# Altium PCB QuarterRoundPCB.PcbDoc
Units mil, origin at the board's own origin, x right, y up, seen from the top; angles counter-clockwise.
Board outline 2283.46 x 2283.46 mil, 2 copper layers (Top Layer, Bottom Layer); 14 components, 20 nets, 174 pads, 28 vias.
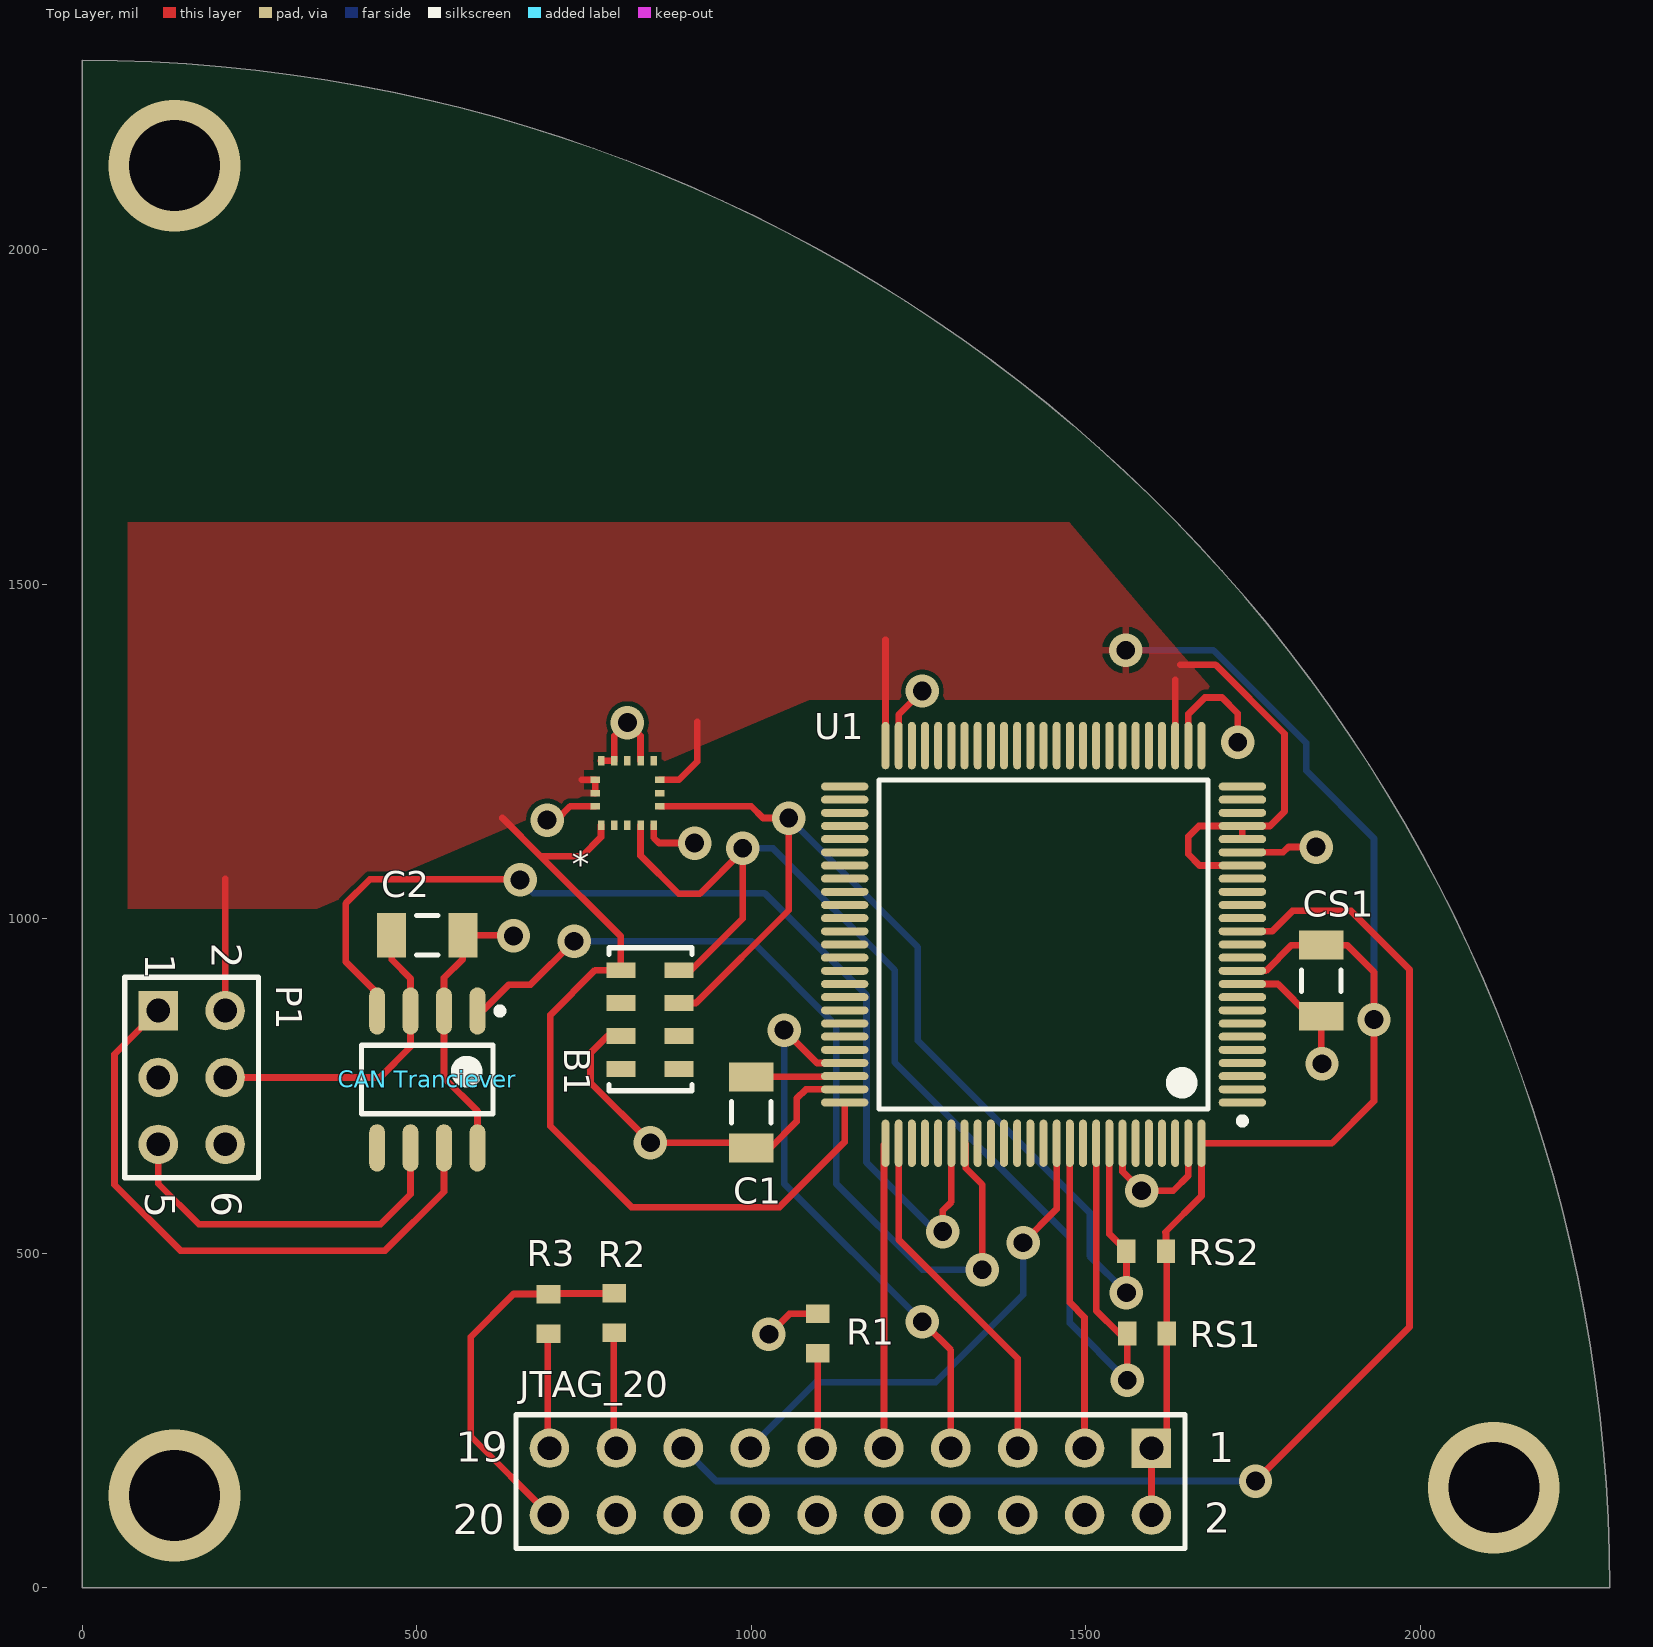
[diagram p0: Top Layer view]
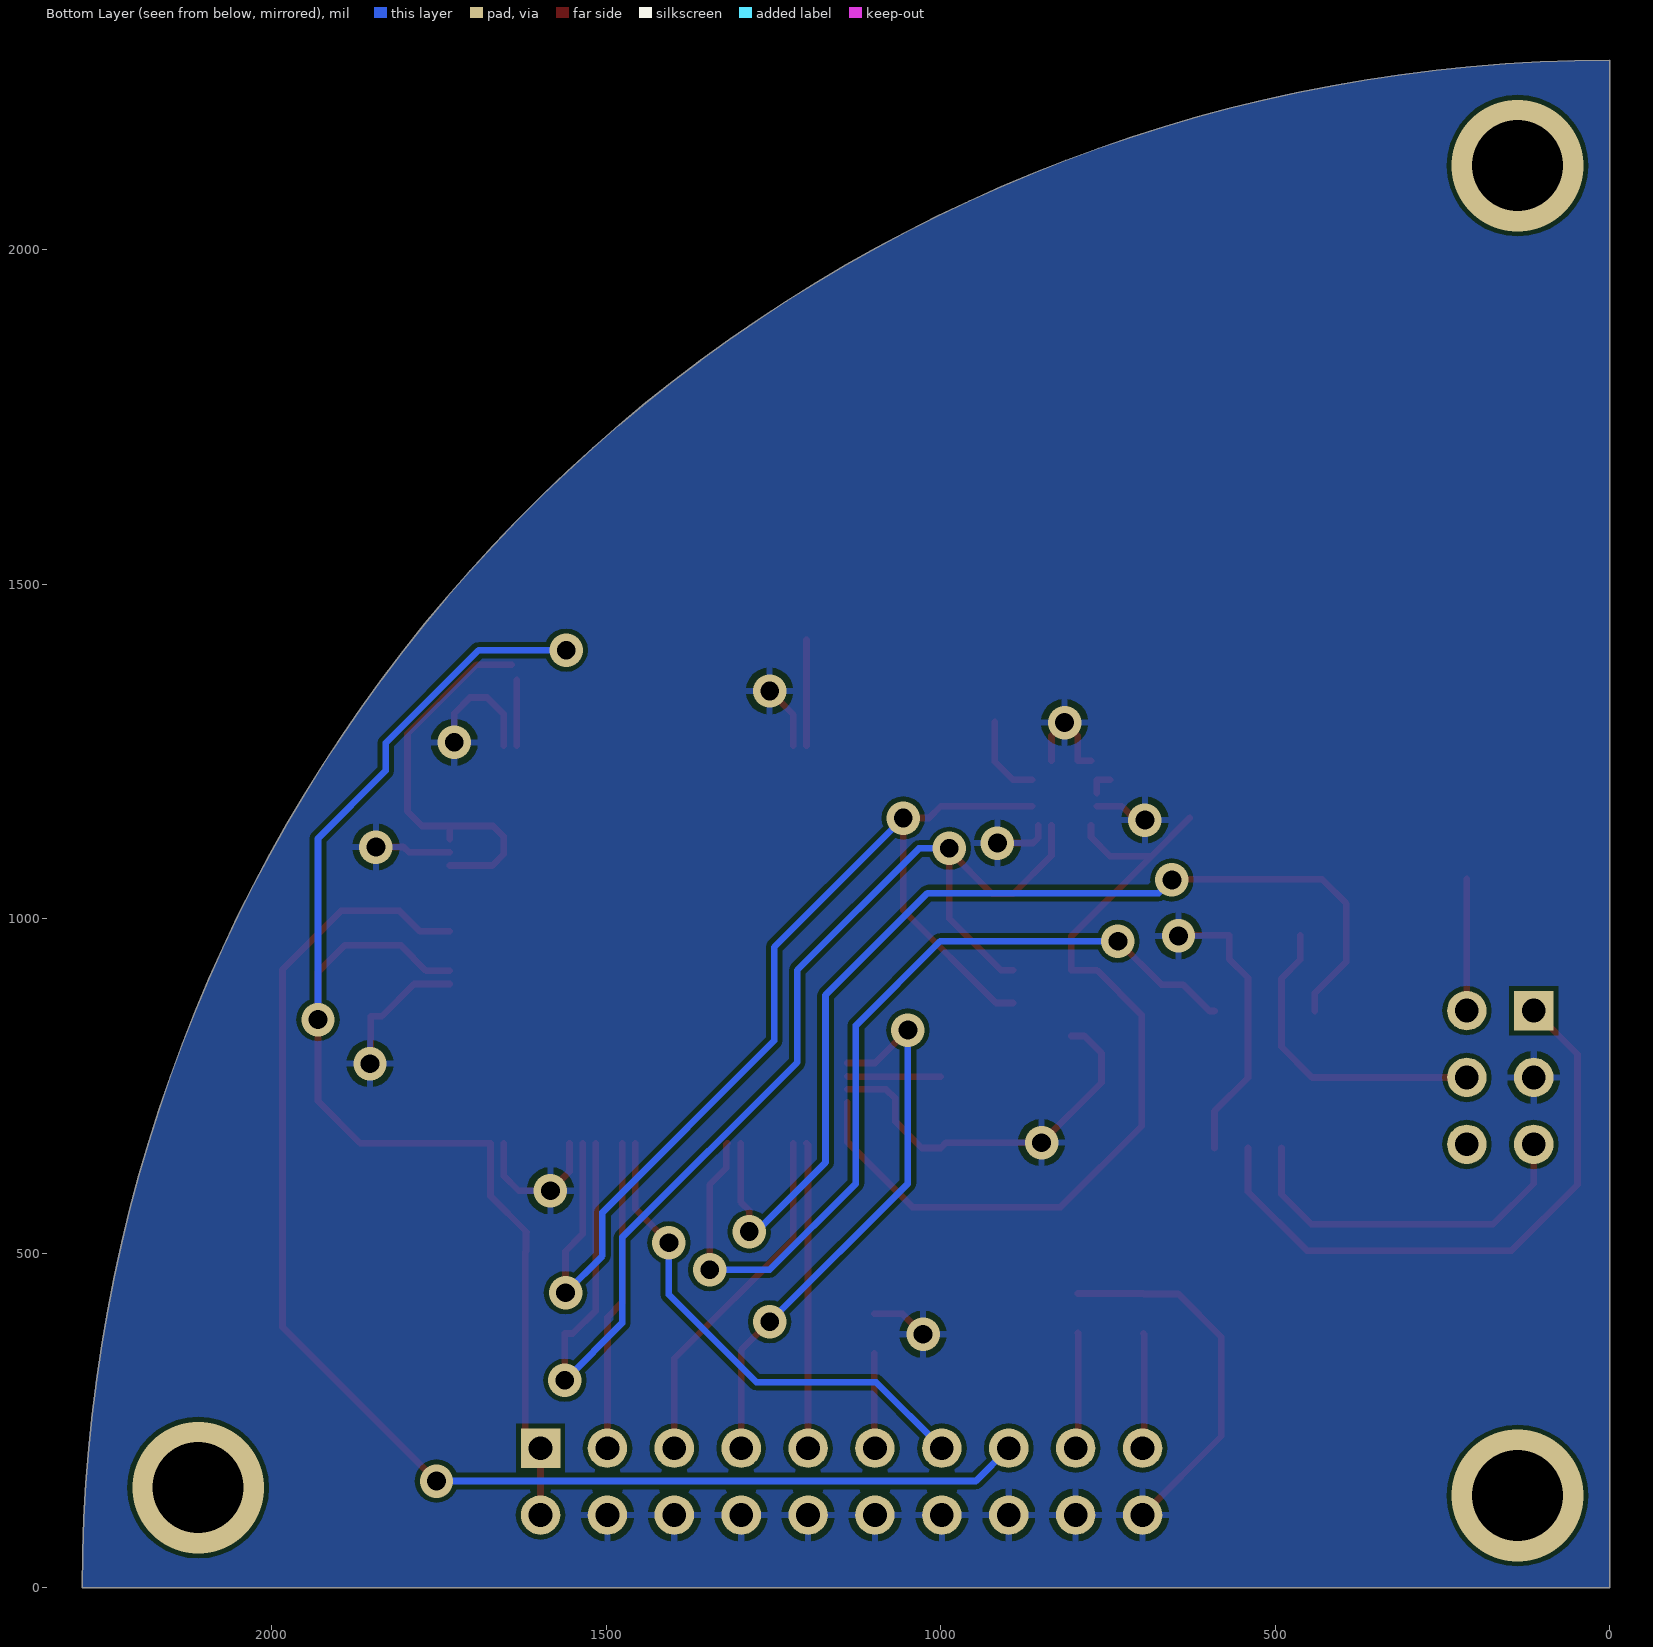
[diagram p1: Bottom Layer view, seen from below]

## Layer stack, top to bottom
Top Solder: solder mask 0.4, Solder Resist, Dk 3.5
Top Layer: signal copper 1.4
Dielectric 1: dielectric 12.6, FR-4, Dk 4.8
Bottom Layer: signal copper 1.4
Bottom Solder: solder mask 0.4, Solder Resist, Dk 3.5

## Board outline
0,2283.46 cw(c0,0) 2283.46,0 0,0

## Design rules (kind name [scope] priority, off if disabled: settings)
Clearance [All] p1: gap=7
HoleSize [All] p1: absolutevalues=TRUE maxlimit=200 minlimit=1 maxpercent=80.000 minpercent=20.000
HoleToHoleClearance [All] p1: gap=7 allowstackedmicrovias=TRUE
MinimumSolderMaskSliver [All] p1: minsoldermaskwidth=1
PolygonConnect [All] p1: connectstyle=Relief reliefconductorwidth=10 reliefentries=4 polygonreliefangle="90 Angle" airgapwidth=10
RoomDefinition Sensors [InComponentClass('Sensors')] p1 off: confinementstyle=ConfineIn formatcopy=TRUE lockcomponents=FALSE outline -3899.61,-2650.59 -1899.61,-2650.59 -1899.61,-1650.59 -3899.61,-1650.59
RoomDefinition apogee_detection_board [InComponentClass('apogee_detection_board')] p2 off: confinementstyle=ConfineIn formatcopy=TRUE lockcomponents=FALSE outline -3899.61,-2650.59 -1899.61,-2650.59 -1899.61,-1650.59 -3899.61,-1650.59
RoutingVias [All] p1: holewidth=28 width=50 viastyle="Through Hole" minholewidth=28 minwidth=50 maxholewidth=28 maxwidth=50
SilkToSilkClearance [All] p1: silktosilkclearance=7
SilkToSolderMaskClearance [IsPad] p1: minsilkscreentomaskgap=3 clearancetoexposedcopper=TRUE
SolderMaskExpansion [All] p1: expansion=4
Width [All] p1: maxlimit=10 minlimit=10 preferedwidth=10
25 further rules are at their usual default settings.

## Classes and differential pairs
component class apogee_detection_board: C1 C2 "CAN Tranciever" JTAG_20 P1 R1 R2 R3
component class Sensors: * B1 CS1 RS1 RS2

## Components (designator, comment, footprint, x,y, rotation, side; value= is the part's Value field where it differs from the comment)
* "LIS331HH Accelerometer" LGA16 775.59,1139.76 r90 top
B1 "MS5607-02BA Barometer" "Barometer LCC" 824.8,923.23 r270 top
C1 "Cap Semi" C1206 1000,710.63 r270 top
C2 "Cap Semi" C1206 515.75,975.39 r180 top
"CAN Tranciever" "TLE8250GVIO" INF-PG-DSO-8-16_N 515.75,759.84 r270 top
CS1 "Cap Semi" C1206 1852.36,907.48 r90 top
JTAG_20 "Header 10X2" HDR2X10 1598.43,208.66 r180 top
P1 "Header 3X2" HDR2X3 113.58,862.8 r270 top
R1 "RTCK PD" J1-0603 1099.41,379.92 r270 top
R2 "DBGRQ PD" J1-0603 795.28,410.43 r270 top
R3 "DBGACK PD" J1-0603 696.85,409.45 r270 top
RS1 "Res3" J1-0603 1591.54,379.92 r0 top
RS2 "Res3" J1-0603 1590.55,502.95 r0 top
U1 "STM32F417VET6" STM-LQFP100_N 1437.01,961.61 r180 top

## Footprints (in the part's own frame and the unit in brackets; to place one, negate y for a bottom-side part, rotate by r counter-clockwise, add the part's x,y. Pads: shape width x height; smd on the part's side, far side on the other; paste and mask are expansions set on the pad)
"Barometer LCC" [mm]
  rect 0.6x1.1 smd: 1(0,-0.5) 2(1.25,-0.5) 3(2.5,-0.5) 4(3.75,-0.5) 5(3.75,1.7) 6(2.5,1.7) 7(1.25,1.7) 8(0,1.7)
  silkscreen extent -0.85,-0.95 4.58,2.2
C1206 [mm] "Chip Capacitor, Body 3.2x1.6mm, IPC High Density"
  rect 1.1x1.7 smd: 1(-1.35,0) 2(1.35,0)
  silkscreen extent -0.4,-0.75 0.4,0.75, body extent -1.7,-0.9 1.7,0.9, height 1.3
HDR2X3 [mm] "Connector; Header; 3x2 Position"
  rect 1.5x1.5 hole 0.9: 1(0,0)
  round 1.5 hole 0.9: 2(0,2.54) 3(2.54,0) 4(2.54,2.54) 5(5.08,0) 6(5.08,2.54)
  silkscreen extent -1.27,-1.27 6.35,3.81
HDR2X10 [mm] "Connector; Header; 10x2 Position"
  rect 1.5x1.5 hole 0.9: 1(0,0)
  round 1.5 hole 0.9: 2(0,2.54) 3(2.54,0) 4(2.54,2.54) 5(5.08,0) 6(5.08,2.54) 7(7.62,0) 8(7.62,2.54) 9(10.16,0) 10(10.16,2.54) 11(12.7,0) 12(12.7,2.54) 13(15.24,0) 14(15.24,2.54) 15(17.78,0) 16(17.78,2.54) 17(20.32,0) 18(20.32,2.54) 19(22.86,0) 20(22.86,2.54)
  silkscreen extent -1.27,-1.27 24.13,3.81
INF-PG-DSO-8-16_N [mm] "SOP, 8-Leads, Body 4.9x3.9mm, Pitch 1.27mm, IPC Medium Density"
  oval 1.8x0.6 smd: 1(-2.6,1.905) 2(-2.6,0.635) 3(-2.6,-0.635) 4(-2.6,-1.905) 5(2.6,-1.905) 6(2.6,-0.635) 7(2.6,0.635) 8(2.6,1.905)
  silkscreen extent -2.72,-2.5 1.3,2.88, body extent -2,-2.5 2,2.5, height 1.75
J1-0603 [mm] "Chip Resistor, Body 1.6x0.8mm, IPC High Density"
  rect 0.7x0.9 smd: 1(-0.75,0) 2(0.75,0)
  body extent -0.85,-0.48 0.85,0.48, height 0.9
LGA16 [mm]
  rect 0.35x0.25 smd: 1(0,0) 2(0,-0.5) 3(0,-1) 4(0,-1.5) 5(0,-2) 9(2.45,-2) 10(2.45,-1.5) 11(2.45,-1) 12(2.45,-0.5) 13(2.45,0)
  rect 0.25x0.35 smd: 6(0.725,-2.225) 7(1.225,-2.225) 8(1.725,-2.225) 14(1.725,0.225) 15(1.225,0.225) 16(0.725,0.225)
STM-LQFP100_N [mm] "Thin QFP, 100-Leads, Body 14x14mm, Pitch 0.5mm, IPC Medium Density"
  oval 1.8x0.3 smd: 1(-7.55,6) 2(-7.55,5.5) 3(-7.55,5) 4(-7.55,4.5) 5(-7.55,4) 6(-7.55,3.5) 7(-7.55,3) 8(-7.55,2.5) 9(-7.55,2) 10(-7.55,1.5) 11(-7.55,1) 12(-7.55,0.5) 13(-7.55,0) 14(-7.55,-0.5) 15(-7.55,-1) 16(-7.55,-1.5) 17(-7.55,-2) 18(-7.55,-2.5) 19(-7.55,-3) 20(-7.55,-3.5) 21(-7.55,-4) 22(-7.55,-4.5) 23(-7.55,-5) 24(-7.55,-5.5) 25(-7.55,-6) 51(7.55,-6) 52(7.55,-5.5) 53(7.55,-5) 54(7.55,-4.5) 55(7.55,-4) 56(7.55,-3.5) 57(7.55,-3) 58(7.55,-2.5) 59(7.55,-2) 60(7.55,-1.5) 61(7.55,-1) 62(7.55,-0.5) 63(7.55,0) 64(7.55,0.5) 65(7.55,1) 66(7.55,1.5) 67(7.55,2) 68(7.55,2.5) 69(7.55,3) 70(7.55,3.5) 71(7.55,4) 72(7.55,4.5) 73(7.55,5) 74(7.55,5.5) 75(7.55,6)
  oval 0.3x1.8 smd: 26(-6,-7.55) 27(-5.5,-7.55) 28(-5,-7.55) 29(-4.5,-7.55) 30(-4,-7.55) 31(-3.5,-7.55) 32(-3,-7.55) 33(-2.5,-7.55) 34(-2,-7.55) 35(-1.5,-7.55) 36(-1,-7.55) 37(-0.5,-7.55) 38(0,-7.55) 39(0.5,-7.55) 40(1,-7.55) 41(1.5,-7.55) 42(2,-7.55) 43(2.5,-7.55) 44(3,-7.55) 45(3.5,-7.55) 46(4,-7.55) 47(4.5,-7.55) 48(5,-7.55) 49(5.5,-7.55) 50(6,-7.55) 76(6,7.55) 77(5.5,7.55) 78(5,7.55) 79(4.5,7.55) 80(4,7.55) 81(3.5,7.55) 82(3,7.55) 83(2.5,7.55) 84(2,7.55) 85(1.5,7.55) 86(1,7.55) 87(0.5,7.55) 88(0,7.55) 89(-0.5,7.55) 90(-1,7.55) 91(-1.5,7.55) 92(-2,7.55) 93(-2.5,7.55) 94(-3,7.55) 95(-3.5,7.55) 96(-4,7.55) 97(-4.5,7.55) 98(-5,7.55) 99(-5.5,7.55) 100(-6,7.55)
  silkscreen extent -7.68,-6.25 6.25,6.82, body extent -7,-7 7,7, height 1.6

## Part data
C1 C2 CS1: "Capacitor (Semiconductor SIM Model)"
"CAN Tranciever": "High Speed CAN-Transceiver, 1 Mbit/s Transmission Rate, PG-DSO-8-16, Reel, Green"
JTAG_20: "Header, 10-Pin, Dual row"
P1: "Header, 3-Pin, Dual row"
R1 R2 R3: library part Res3, "Resistor"
RS1 RS2: "Resistor"
U1: "ARM Cortex-M4 32-bit MCU+FPU, 210 DMIPS, 512 kB Flash, 192 kB Internal RAM, 82 I/Os, 100-pin LQFP, -40 to 85 degC, Tray"

## Via types
v1: diameter 50, hole 28, Top Layer to Bottom Layer, 25 vias
v2: diameter 196.85, hole 135.83, Top Layer to Bottom Layer, 3 vias

## Nets (pads, with @x,y where several pads share a name; then routed paths per layer and width w, separated by ;. In a path a pad name is that pad's centre, name@x,y a point inside that pad or via, vN(x,y) a via of type N, cw(c..) or ccw(c..) an arc to the next point about the centre after c; other vN are vias at no path point)
"ACT 12V": P1.6
CAN_5V: "CAN Tranciever.3" C2.2 P1.4 | length 474.6
  Top Layer w10: P1.4 444.88,762.8 490.75,808.66 490.75,862.2 490.75,910.83 462.6,938.98 C2.2
GND: "CAN Tranciever.2" "CAN Tranciever.8" *.5 *.10 *.12 *.13 *.16 B1.3 C1.2 C2.1 CS1.1 JTAG_20.4 JTAG_20.6 JTAG_20.8 JTAG_20.10 JTAG_20.12 JTAG_20.14 JTAG_20.16 JTAG_20.18 JTAG_20.20 P1.3 R1.1 R2.1 R3.1 U1.10 U1.20 U1.27 U1.49 U1.74 U1.94 U1.99 | length 2772.8
  Top Layer w10: 590.75,657.48 590.75,712.4 540.75,762.4 540.75,862.2 540.75,911.81 568.9,939.96 C2.1 643.7,975.39 v1(644.68,974.41) ; v1(694.88,1147.64) 708.66,1147.64 729.33,1168.31 *.16 ; JTAG_20.20 580.71,226.38 580.71,375 644.69,438.98 R3.1 697.83,439.96 R2.1 ; *.13 *.12 795.28,1273.62 v1(814.96,1293.31) 834.65,1273.62 *.10 ; B1.3 785.43,824.8 759.84,799.21 759.84,754.92 v1(849.41,665.35) 992.13,665.35 C1.2 1028.54,657.48 1067.91,696.85 1067.91,731.3 1081.69,745.08 U1.74 ; *.5 854.33,1121.06 862.2,1113.19 v1(915.35,1113.19) ; v1(1026.57,378.94) 1057.09,409.45 R1.1 ; U1.49 1220.47,1305.12 v1(1255.91,1340.55) ; U1.94 1555.12,622.05 v1(1583.66,593.5) 1630.91,593.5 1653.54,616.14 U1.99 ; U1.27 1653.54,1306.1 1678.15,1330.71 1703.74,1330.71 1727.36,1307.09 v1(1727.36,1263.78) ; U1.10 1787.4,902.56 1835.63,854.33 CS1.1 1852.36,784.45 v1(1853.35,783.46) ; U1.20 1795.28,1099.41 1803.15,1107.28 v1(1844.49,1107.28)
Net*_4: *.4 B1.8 RS1.1 U1.92 | length 1916.9
  Top Layer w10: *.4 834.65,1094.49 891.73,1037.4 923.23,1037.4 987.2,1101.38 987.2,1000 910.43,923.23 B1.8 ; U1.92 1515.75,414.37 1550.2,379.92 RS1.1 v1(1562.01,310.04)
  Bottom Layer w10: v1(987.2,1105.32) 1032.48,1105.32 1214.57,923.23 1214.57,785.43 1476.38,523.62 1476.38,395.67 v1(1562.01,310.04)
Net*_6: *.6 B1.7 RS2.1 U1.93 | length 1712.7
  Top Layer w10: *.6 1000,1168.31 1017.72,1150.59 v1(1056.1,1150.59) 1056.1,1012.8 917.32,874.02 B1.7 ; U1.93 1535.43,528.54 RS2.1 v1(1561.02,440.94)
  Bottom Layer w10: v1(1056.1,1150.59) 1249.02,957.68 1249.02,817.91 1505.91,561.02 1505.91,496.06 v1(1561.02,440.94)
NetC1_1: C1.1 U1.73 | length 140.2
  Top Layer w10: C1.1 1138.78,763.78 U1.73
"NetCAN Tranciever_1": "CAN Tranciever.1" U1.82 | length 1339.7
  Top Layer w10: 590.75,862.2 598.42,862.2 637.8,901.57 670.28,901.57 v1(735.24,966.54) ; U1.82 1320.68,662.59 1320.68,627.43 1345.47,602.63 v1(1345.47,475.39)
  Bottom Layer w10: v1(735.24,966.54) 1000.98,966.54 1126.97,840.55 1126.97,604.33 1255.91,475.39 v1(1345.47,475.39)
"NetCAN Tranciever_4": "CAN Tranciever.4" U1.81 | length 1589.5
  Top Layer w10: 440.75,862.2 440.75,888.98 393.7,936.02 393.7,1022.64 430.12,1059.06 653.54,1059.06 v1(654.53,1058.07) ; v1(1286.42,532.48) 1286.42,563.98 1299.21,576.77 U1.81
  Bottom Layer w10: v1(654.53,1058.07) 674.21,1038.39 1019.69,1038.39 1172.24,885.83 1172.24,635.83 1275.59,532.48 v1(1286.42,532.48)
"NetCAN Tranciever_6": "CAN Tranciever.6" P1.5 | length 549
  Top Layer w10: P1.5 113.58,603.94 174.21,543.31 445.87,543.31 490.75,588.19 490.75,657.48
"NetCAN Tranciever_7": "CAN Tranciever.7" P1.1 | length 922.8
  Top Layer w10: P1.1 48.23,797.44 48.23,602.36 146.65,503.94 452.76,503.94 540.75,591.93 540.75,657.48
NetJTAG_20_3: JTAG_20.3 U1.90 | length 464.8
  Top Layer w10: U1.90 1476.38,426.18 1498.43,404.13 JTAG_20.3
NetJTAG_20_5: JTAG_20.5 U1.77 | length 529.4
  Top Layer w10: U1.77 1220.47,520.67 1398.43,342.72 JTAG_20.5
NetJTAG_20_7: JTAG_20.7 U1.72 | length 839.2
  Top Layer w10: v1(1049.21,833.66) 1098.43,784.45 U1.72 ; v1(1255.91,397.64) 1298.43,355.12 JTAG_20.7
  Bottom Layer w10: v1(1049.21,833.66) 1049.21,604.33 v1(1255.91,397.64)
NetJTAG_20_9: JTAG_20.9 U1.76 | length 456.7
  Top Layer w10: JTAG_20.9 1198.43,662.01 U1.76
NetJTAG_20_11: JTAG_20.11 R1.2 | length 142.1
  Top Layer w10: JTAG_20.11 1099.41,209.65 R1.2
NetJTAG_20_13: JTAG_20.13 U1.89 | length 750.2
  Top Layer w10: v1(1406.5,515.75) 1456.69,565.95 U1.89
  Bottom Layer w10: JTAG_20.13 1096.85,307.09 1275.59,307.09 1406.5,437.99 v1(1406.5,515.75)
NetJTAG_20_15: JTAG_20.15 U1.14 | length 2035
  Top Layer w10: U1.14 1778.54,981.3 1809.06,1011.81 1896.65,1011.81 1984.25,924.21 1984.25,389.76 v1(1753.94,159.45)
  Bottom Layer w10: JTAG_20.15 947.64,159.45 v1(1753.94,159.45)
NetJTAG_20_17: JTAG_20.17 R2.2 | length 174.4
  Top Layer w10: R2.2 794.29,379.92 794.29,212.79 JTAG_20.17
NetJTAG_20_19: JTAG_20.19 R3.2 | length 172.7
  Top Layer w10: R3.2 695.87,378.94 695.87,211.22 JTAG_20.19
VCC: *.1 *.8 *.14 *.15 B1.1 CS1.2 JTAG_20.1 JTAG_20.2 P1.2 RS1.2 RS2.2 U1.11 U1.19 U1.21 U1.22 U1.28 U1.50 U1.75 U1.100 | length 4614.6
  Top Layer w10: P1.2 213.58,1060.04 ; 627.95,1150.59 685.04,1093.5 ; 747.05,1207.68 *.14 *.15 ; *.1 775.59,1122.05 747.05,1093.5 685.04,1093.5 ; *.8 891.73,1207.68 919.29,1235.24 919.29,1294.29 ; U1.75 1139.76,666.34 1042.32,568.9 820.87,568.9 699.8,689.96 699.8,856.3 766.73,923.23 B1.1 805.12,973.42 685.04,1093.5 ; U1.50 1200.79,1417.32 ; JTAG_20.2 JTAG_20.1 1621.06,231.3 1621.06,501.97 RS2.2 1620.08,530.51 1619.09,531.5 1673.23,585.63 U1.100 1868.11,664.37 1931.1,727.36 v1(1931.1,849.41) 1931.1,920.28 1890.75,960.63 CS1.2 1807.8,960.63 1769.42,922.24 U1.11 ; U1.28 1633.86,1357.28 ; 1641.73,1379.92 1693.9,1379.92 1797.24,1276.57 1797.24,1160.43 1775.59,1138.78 U1.22 ; U1.19 1670.28,1079.72 1653.54,1096.46 1653.54,1123.03 1669.29,1138.78 U1.22 ; U1.21 U1.22
  Bottom Layer w10: v1(1560.04,1401.57) 1690.94,1401.57 1829.72,1262.8 1829.72,1221.46 1931.1,1120.08 v1(1931.1,849.41)
pads on no net: "CAN Tranciever.5" *.2 *.3 *.7 *.9 *.11 B1.2 B1.4 B1.5 B1.6 U1.1 U1.2 U1.3 U1.4 U1.5 U1.6 U1.7 U1.8 U1.9 U1.12 U1.13 U1.15 U1.16 U1.17 U1.18 U1.23 U1.24 U1.25 U1.26 U1.29 U1.30 U1.31 U1.32 U1.33 U1.34 U1.35 U1.36 U1.37 U1.38 U1.39 U1.40 U1.41 U1.42 U1.43 U1.44 U1.45 U1.46 U1.47 U1.48 U1.51 U1.52 U1.53 U1.54 U1.55 U1.56 U1.57 U1.58 U1.59 U1.60 U1.61 U1.62 U1.63 U1.64 U1.65 U1.66 U1.67 U1.68 U1.69 U1.70 U1.71 U1.78 U1.79 U1.80 U1.83 U1.84 U1.85 U1.86 U1.87 U1.88 U1.91 U1.95 U1.96 U1.97 U1.98
copper on no net: | length 5.6
  Top Layer w0: v2@2163.39,124.02 v2@2167.32,127.95
  other v2: 137.8,137.8 2110.24,149.61 137.8,2125.98

## Polygon pours and split planes (outlines as drawn)
GND on Bottom Layer "Ground Plane" (solid, remove dead copper, pour order 4): 0,2283.46 cw(c0,0) 2283.46,0 0,0
VCC on Top Layer "VCC_L01_P002" (solid, pour order 2): 67.91,1592.52 1475.39,1592.52 1591.54,1455.71 1702.76,1327.76 1436.02,1327.76 1087.6,1327.76 351.38,1014.76 67.91,1014.76 67.91,1335.63

## Silkscreen, mask and mechanical layers (free items; w line width, h text height)
Mechanical 1:
  the board outline again, w10

## Text inside footprints (layer, text, board x,y; h text height)
JTAG_20: Top Overlay "2" at 1677.17,82.09 h45; Top Overlay "1" at 1683.07,187.4 h45; Top Overlay "19" at 558.07,188.39 h45; Top Overlay "20" at 554.13,80.12 h45
P1: Top Overlay "6" at 193.31,592.91 h45 r270; Top Overlay "5" at 93.9,590.95 h45 r270; Top Overlay "2" at 193.31,963.98 h45 r270; Top Overlay "1" at 93.9,948.23 h45 r270